# Altium PCB SEG_pressure gauge_up  V2.1.PcbDoc (part 3 of 5)
Units mm, origin at the board's own origin, x right, y up, seen from the top; angles counter-clockwise.
Board outline 67.74 x 67.74 mm, 2 copper layers (Top Layer, Bottom Layer); 36 components, 59 nets, 200 pads, 20 vias.
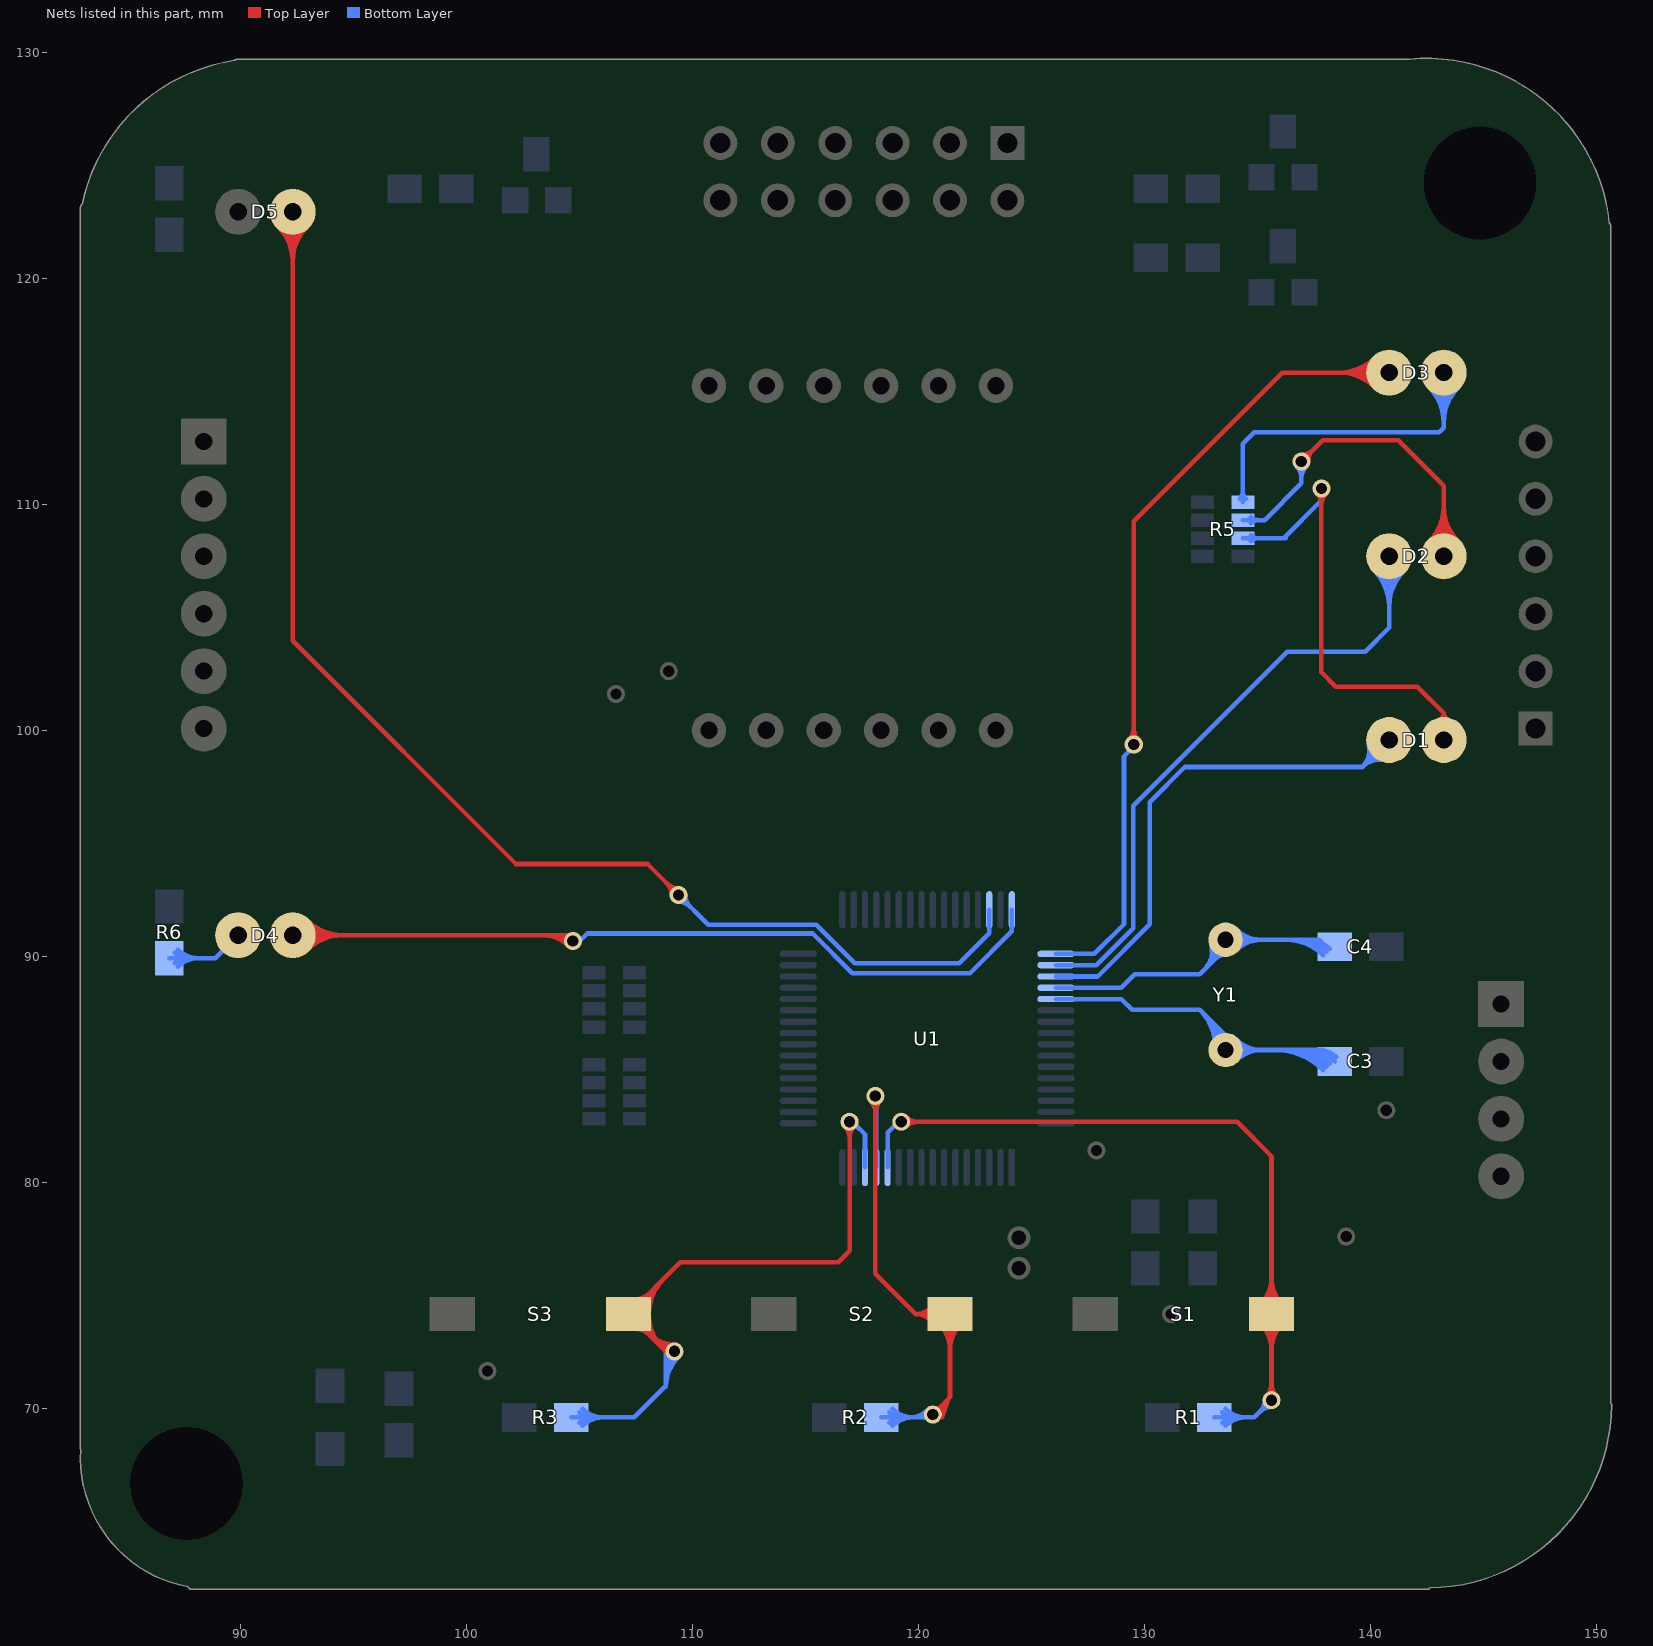
[diagram p3: the nets of this part, all layers, seen from the top]

## Via types
v1: diameter 0.8, hole 0.5, Top Layer to Bottom Layer, 20 vias

## Nets (pads, with @x,y where several pads share a name; then routed paths per layer and width w, separated by ;. In a path a pad name is that pad's centre, name@x,y a point inside that pad or via, vN(x,y) a via of type N, cw(c..) or ccw(c..) an arc to the next point about the centre after c; other vN are vias at no path point) (continued)
KEY1: pad.0@119.253,82.677 pad.1 R1.1 S1.1 U1.12 | length 107.5
  Top Layer w0.203: pad.0@119.253,82.677 134.112,82.677 135.636,81.153 S1.1@135.636,74.168 pad.1@135.636,70.358 ; pad.0@119.464,82.466 cw(c119.973,81.957) 119.973,82.677 ; pad.0@119.464,82.466 cw(c119.973,81.957) 119.973,82.677 ; pad.0@119.464,82.466 cw(c119.973,81.957) 119.973,82.677 ; pad.0@119.464,82.466 cw(c119.973,81.957) 119.973,82.677 ; pad.0@119.464,82.466 cw(c119.973,81.957) 119.973,82.677 ; pad.0@119.464,82.888 ccw(c119.973,83.397) 119.973,82.677 ; pad.0@119.464,82.888 ccw(c119.973,83.397) 119.973,82.677 ; pad.0@119.464,82.888 ccw(c119.973,83.397) 119.973,82.677 ; pad.0@119.464,82.888 ccw(c119.973,83.397) 119.973,82.677 ; pad.0@119.464,82.888 ccw(c119.973,83.397) 119.973,82.677 ; S1.1@135.178,73.71 cw(c134.071,72.603) 135.636,72.603 ; S1.1@135.178,73.71 cw(c134.071,72.603) 135.636,72.603 ; S1.1@135.178,73.71 cw(c134.071,72.603) 135.636,72.603 ; S1.1@135.178,73.71 cw(c134.071,72.603) 135.636,72.603 ; S1.1@135.178,73.71 cw(c134.071,72.603) 135.636,72.603 ; S1.1@135.178,74.626 ccw(c134.071,75.733) 135.636,75.733 ; S1.1@135.178,74.626 ccw(c134.071,75.733) 135.636,75.733 ; S1.1@135.178,74.626 ccw(c134.071,75.733) 135.636,75.733 ; S1.1@135.178,74.626 ccw(c134.071,75.733) 135.636,75.733 ; S1.1@135.178,74.626 ccw(c134.071,75.733) 135.636,75.733 ; S1.1@135.321,73.853 cw(c134.561,73.093) 135.636,73.093 ; S1.1@135.321,73.853 cw(c134.561,73.093) 135.636,73.093 ; S1.1@135.321,73.853 cw(c134.561,73.093) 135.636,73.093 ; S1.1@135.321,73.853 cw(c134.561,73.093) 135.636,73.093 ; S1.1@135.321,73.853 cw(c134.561,73.093) 135.636,73.093 ; S1.1@135.321,74.483 ccw(c134.561,75.243) 135.636,75.243 ; S1.1@135.321,74.483 ccw(c134.561,75.243) 135.636,75.243 ; S1.1@135.321,74.483 ccw(c134.561,75.243) 135.636,75.243 ; S1.1@135.321,74.483 ccw(c134.561,75.243) 135.636,75.243 ; S1.1@135.321,74.483 ccw(c134.561,75.243) 135.636,75.243 ; pad.1@135.425,70.569 ccw(c134.916,71.078) 135.636,71.078 ; pad.1@135.425,70.569 ccw(c134.916,71.078) 135.636,71.078 ; pad.1@135.425,70.569 ccw(c134.916,71.078) 135.636,71.078 ; pad.1@135.425,70.569 ccw(c134.916,71.078) 135.636,71.078 ; pad.1@135.425,70.569 ccw(c134.916,71.078) 135.636,71.078 ; 135.636,71.078 ccw(c136.356,71.078) pad.1@135.847,70.569 ; 135.636,71.078 ccw(c136.356,71.078) pad.1@135.847,70.569 ; 135.636,71.078 ccw(c136.356,71.078) pad.1@135.847,70.569 ; 135.636,71.078 ccw(c136.356,71.078) pad.1@135.847,70.569 ; 135.636,71.078 ccw(c136.356,71.078) pad.1@135.847,70.569 ; 135.636,72.603 cw(c137.201,72.603) S1.1@136.094,73.71 ; 135.636,72.603 cw(c137.201,72.603) S1.1@136.094,73.71 ; 135.636,72.603 cw(c137.201,72.603) S1.1@136.094,73.71 ; 135.636,72.603 cw(c137.201,72.603) S1.1@136.094,73.71 ; 135.636,72.603 cw(c137.201,72.603) S1.1@136.094,73.71 ; 135.636,73.093 cw(c136.711,73.093) S1.1@135.951,73.853 ; 135.636,73.093 cw(c136.711,73.093) S1.1@135.951,73.853 ; 135.636,73.093 cw(c136.711,73.093) S1.1@135.951,73.853 ; 135.636,73.093 cw(c136.711,73.093) S1.1@135.951,73.853 ; 135.636,73.093 cw(c136.711,73.093) S1.1@135.951,73.853 ; 135.636,75.243 ccw(c136.711,75.243) S1.1@135.951,74.483 ; 135.636,75.243 ccw(c136.711,75.243) S1.1@135.951,74.483 ; 135.636,75.243 ccw(c136.711,75.243) S1.1@135.951,74.483 ; 135.636,75.243 ccw(c136.711,75.243) S1.1@135.951,74.483 ; 135.636,75.243 ccw(c136.711,75.243) S1.1@135.951,74.483 ; 135.636,75.733 ccw(c137.201,75.733) S1.1@136.094,74.626 ; 135.636,75.733 ccw(c137.201,75.733) S1.1@136.094,74.626 ; 135.636,75.733 ccw(c137.201,75.733) S1.1@136.094,74.626 ; 135.636,75.733 ccw(c137.201,75.733) S1.1@136.094,74.626 ; 135.636,75.733 ccw(c137.201,75.733) S1.1@136.094,74.626
  Bottom Layer w0.203: U1.12@118.649,80.656 118.649,82.2 pad.0@118.999,82.55 ; R1.1@133.096,69.596 134.874,69.596 pad.1@135.636,70.358 ; R1.1@133.456,69.363 cw(c134.02,68.799) 134.02,69.596 ; R1.1@133.456,69.363 cw(c134.02,68.799) 134.02,69.596 ; R1.1@133.456,69.363 cw(c134.02,68.799) 134.02,69.596 ; R1.1@133.456,69.363 cw(c134.02,68.799) 134.02,69.596 ; R1.1@133.456,69.363 cw(c134.02,68.799) 134.02,69.596 ; R1.1@133.456,69.829 ccw(c134.02,70.393) 134.02,69.596 ; R1.1@133.456,69.829 ccw(c134.02,70.393) 134.02,69.596 ; R1.1@133.456,69.829 ccw(c134.02,70.393) 134.02,69.596 ; R1.1@133.456,69.829 ccw(c134.02,70.393) 134.02,69.596 ; R1.1@133.456,69.829 ccw(c134.02,70.393) 134.02,69.596 ; R1.1@133.6,69.219 cw(c134.511,68.308) 134.511,69.596 ; R1.1@133.6,69.219 cw(c134.511,68.308) 134.511,69.596 ; R1.1@133.6,69.219 cw(c134.511,68.308) 134.511,69.596 ; R1.1@133.6,69.219 cw(c134.511,68.308) 134.511,69.596 ; R1.1@133.6,69.219 cw(c134.511,68.308) 134.511,69.596 ; R1.1@133.6,69.973 ccw(c134.511,70.884) 134.511,69.596 ; R1.1@133.6,69.973 ccw(c134.511,70.884) 134.511,69.596 ; R1.1@133.6,69.973 ccw(c134.511,70.884) 134.511,69.596 ; R1.1@133.6,69.973 ccw(c134.511,70.884) 134.511,69.596 ; R1.1@133.6,69.973 ccw(c134.511,70.884) 134.511,69.596 ; 135.127,69.849 cw(c135.636,69.339) pad.1@135.636,70.06 ; 135.127,69.849 ccw(c134.617,70.358) pad.1@135.338,70.358 ; 135.127,69.849 cw(c135.636,69.339) pad.1@135.636,70.06 ; 135.127,69.849 ccw(c134.617,70.358) pad.1@135.338,70.358 ; 135.127,69.849 cw(c135.636,69.339) pad.1@135.636,70.06 ; 135.127,69.849 ccw(c134.617,70.358) pad.1@135.338,70.358 ; 135.127,69.849 cw(c135.636,69.339) pad.1@135.636,70.06 ; 135.127,69.849 ccw(c134.617,70.358) pad.1@135.338,70.358 ; 135.127,69.849 ccw(c134.617,70.358) pad.1@135.338,70.358 ; 135.127,69.849 cw(c135.636,69.339) pad.1@135.636,70.06
KEY2: pad.0@120.65,69.723 pad.3@118.11,83.82 R2.1 S2.1 U1.13 | length 95.2
  Top Layer w0.203: pad.3@118.11,83.82 118.11,75.946 119.888,74.168 ; 121.031,69.901 121.336,70.409 ; pad.3@117.899,83.609 cw(c117.39,83.1) 118.11,83.1 ; pad.3@117.899,83.609 cw(c117.39,83.1) 118.11,83.1 ; pad.3@117.899,83.609 cw(c117.39,83.1) 118.11,83.1 ; pad.3@117.899,83.609 cw(c117.39,83.1) 118.11,83.1 ; pad.3@117.899,83.609 cw(c117.39,83.1) 118.11,83.1 ; 118.11,83.1 cw(c118.83,83.1) pad.3@118.321,83.609 ; 118.11,83.1 cw(c118.83,83.1) pad.3@118.321,83.609 ; 118.11,83.1 cw(c118.83,83.1) pad.3@118.321,83.609 ; 118.11,83.1 cw(c118.83,83.1) pad.3@118.321,83.609 ; 118.11,83.1 cw(c118.83,83.1) pad.3@118.321,83.609 ; 119.888,74.168 cw(c119.888,73.241) S2.1@120.638,73.786 ; 119.888,74.168 ccw(c119.888,75.095) S2.1@120.638,74.55 ; 119.888,74.168 cw(c119.888,73.241) S2.1@120.638,73.786 ; 119.888,74.168 ccw(c119.888,75.095) S2.1@120.638,74.55 ; 119.888,74.168 cw(c119.888,73.241) S2.1@120.638,73.786 ; 119.888,74.168 ccw(c119.888,75.095) S2.1@120.638,74.55 ; 119.888,74.168 cw(c119.888,73.241) S2.1@120.638,73.786 ; 119.888,74.168 ccw(c119.888,75.095) S2.1@120.638,74.55 ; 119.888,74.168 ccw(c119.888,75.095) S2.1@120.638,74.55 ; 119.888,74.168 cw(c119.888,73.241) S2.1@120.638,73.786 ; 119.888,74.168 S2.1@121.412,74.168 121.412,70.485 121.336,70.409 ; 120.287,74.168 cw(c120.287,73.531) S2.1@120.802,73.906 ; 120.287,74.168 ccw(c120.287,74.805) S2.1@120.802,74.43 ; 120.287,74.168 cw(c120.287,73.531) S2.1@120.802,73.906 ; 120.287,74.168 ccw(c120.287,74.805) S2.1@120.802,74.43 ; 120.287,74.168 cw(c120.287,73.531) S2.1@120.802,73.906 ; 120.287,74.168 ccw(c120.287,74.805) S2.1@120.802,74.43 ; 120.287,74.168 cw(c120.287,73.531) S2.1@120.802,73.906 ; 120.287,74.168 ccw(c120.287,74.805) S2.1@120.802,74.43 ; 120.287,74.168 ccw(c120.287,74.805) S2.1@120.802,74.43 ; 120.287,74.168 cw(c120.287,73.531) S2.1@120.802,73.906 ; S2.1@120.954,73.71 cw(c119.847,72.603) 121.412,72.603 ; S2.1@120.954,73.71 cw(c119.847,72.603) 121.412,72.603 ; S2.1@120.954,73.71 cw(c119.847,72.603) 121.412,72.603 ; S2.1@120.954,73.71 cw(c119.847,72.603) 121.412,72.603 ; S2.1@120.954,73.71 cw(c119.847,72.603) 121.412,72.603 ; S2.1@121.097,73.853 cw(c120.337,73.093) 121.412,73.093 ; S2.1@121.097,73.853 cw(c120.337,73.093) 121.412,73.093 ; S2.1@121.097,73.853 cw(c120.337,73.093) 121.412,73.093 ; S2.1@121.097,73.853 cw(c120.337,73.093) 121.412,73.093 ; S2.1@121.097,73.853 cw(c120.337,73.093) 121.412,73.093 ; 121.336,70.409 121.056,69.596 pad.0@120.65,69.723 121.336,70.409 ; 121.412,72.603 cw(c122.977,72.603) S2.1@121.87,73.71 ; 121.412,72.603 cw(c122.977,72.603) S2.1@121.87,73.71 ; 121.412,72.603 cw(c122.977,72.603) S2.1@121.87,73.71 ; 121.412,72.603 cw(c122.977,72.603) S2.1@121.87,73.71 ; 121.412,72.603 cw(c122.977,72.603) S2.1@121.87,73.71 ; 121.412,73.093 cw(c122.487,73.093) S2.1@121.727,73.853 ; 121.412,73.093 cw(c122.487,73.093) S2.1@121.727,73.853 ; 121.412,73.093 cw(c122.487,73.093) S2.1@121.727,73.853 ; 121.412,73.093 cw(c122.487,73.093) S2.1@121.727,73.853 ; 121.412,73.093 cw(c122.487,73.093) S2.1@121.727,73.853
  Bottom Layer w0.203: U1.13@118.149,80.656 pad.3@118.149,83.566 ; R2.1@118.364,69.596 120.523,69.596 pad.0@120.65,69.723 ; pad.3@117.899,83.609 cw(c117.295,83.005) 118.149,83.005 ; pad.3@117.899,83.609 cw(c117.295,83.005) 118.149,83.005 ; pad.3@117.899,83.609 cw(c117.295,83.005) 118.149,83.005 ; pad.3@117.899,83.609 cw(c117.295,83.005) 118.149,83.005 ; pad.3@117.899,83.609 cw(c117.295,83.005) 118.149,83.005 ; 118.149,83.194 cw(c118.736,83.194) pad.3@118.321,83.609 ; 118.149,83.194 cw(c118.736,83.194) pad.3@118.321,83.609 ; 118.149,83.194 cw(c118.736,83.194) pad.3@118.321,83.609 ; 118.149,83.194 cw(c118.736,83.194) pad.3@118.321,83.609 ; 118.149,83.194 cw(c118.736,83.194) pad.3@118.321,83.609 ; R2.1@118.724,69.363 cw(c119.288,68.799) 119.288,69.596 ; R2.1@118.724,69.363 cw(c119.288,68.799) 119.288,69.596 ; R2.1@118.724,69.363 cw(c119.288,68.799) 119.288,69.596 ; R2.1@118.724,69.363 cw(c119.288,68.799) 119.288,69.596 ; R2.1@118.724,69.363 cw(c119.288,68.799) 119.288,69.596 ; R2.1@118.724,69.829 ccw(c119.288,70.393) 119.288,69.596 ; R2.1@118.724,69.829 ccw(c119.288,70.393) 119.288,69.596 ; R2.1@118.724,69.829 ccw(c119.288,70.393) 119.288,69.596 ; R2.1@118.724,69.829 ccw(c119.288,70.393) 119.288,69.596 ; R2.1@118.724,69.829 ccw(c119.288,70.393) 119.288,69.596 ; R2.1@118.868,69.219 cw(c119.779,68.308) 119.779,69.596 ; R2.1@118.868,69.219 cw(c119.779,68.308) 119.779,69.596 ; R2.1@118.868,69.219 cw(c119.779,68.308) 119.779,69.596 ; R2.1@118.868,69.219 cw(c119.779,68.308) 119.779,69.596 ; R2.1@118.868,69.219 cw(c119.779,68.308) 119.779,69.596 ; R2.1@118.868,69.973 ccw(c119.779,70.884) 119.779,69.596 ; R2.1@118.868,69.973 ccw(c119.779,70.884) 119.779,69.596 ; R2.1@118.868,69.973 ccw(c119.779,70.884) 119.779,69.596 ; R2.1@118.868,69.973 ccw(c119.779,70.884) 119.779,69.596 ; R2.1@118.868,69.973 ccw(c119.779,70.884) 119.779,69.596 ; 119.623,69.596 ccw(c119.623,70.75) pad.0@120.439,69.934 ; 119.623,69.596 ccw(c119.623,70.75) pad.0@120.439,69.934 ; 119.623,69.596 ccw(c119.623,70.75) pad.0@120.439,69.934 ; 119.623,69.596 ccw(c119.623,70.75) pad.0@120.439,69.934 ; 119.623,69.596 ccw(c119.623,70.75) pad.0@120.439,69.934 ; 120.114,69.596 ccw(c120.114,70.259) pad.0@120.583,69.79 ; 120.114,69.596 ccw(c120.114,70.259) pad.0@120.583,69.79 ; 120.114,69.596 ccw(c120.114,70.259) pad.0@120.583,69.79 ; 120.114,69.596 ccw(c120.114,70.259) pad.0@120.583,69.79 ; 120.114,69.596 ccw(c120.114,70.259) pad.0@120.583,69.79 ; 120.236,69.596 cw(c120.236,69.309) pad.0@120.439,69.512 ; 120.236,69.596 cw(c120.236,69.309) pad.0@120.439,69.512 ; 120.236,69.596 cw(c120.236,69.309) pad.0@120.439,69.512 ; 120.236,69.596 cw(c120.236,69.309) pad.0@120.439,69.512 ; 120.236,69.596 cw(c120.236,69.309) pad.0@120.439,69.512
KEY3: pad.2@116.967,82.677 pad.19 R3.1 S3.1 U1.14 | length 129.7
  Top Layer w0.203: pad.19@109.22,72.517 108.839,72.517 S3.1@107.188,74.168 109.474,76.454 116.459,76.454 116.967,76.962 pad.2@116.967,82.677 ; S3.1@107.438,73.52 cw(c107.438,72.558) 108.118,73.238 ; S3.1@107.438,73.52 cw(c107.438,72.558) 108.118,73.238 ; S3.1@107.438,73.52 cw(c107.438,72.558) 108.118,73.238 ; S3.1@107.438,73.52 cw(c107.438,72.558) 108.118,73.238 ; S3.1@107.438,73.52 cw(c107.438,72.558) 108.118,73.238 ; S3.1@107.438,74.816 ccw(c107.438,75.778) 108.118,75.098 ; S3.1@107.438,74.816 ccw(c107.438,75.778) 108.118,75.098 ; S3.1@107.438,74.816 ccw(c107.438,75.778) 108.118,75.098 ; S3.1@107.438,74.816 ccw(c107.438,75.778) 108.118,75.098 ; S3.1@107.438,74.816 ccw(c107.438,75.778) 108.118,75.098 ; S3.1@107.68,74.167 ccw(c108.854,74.162) 108.024,73.332 ; S3.1@107.68,74.167 ccw(c108.854,74.162) 108.024,73.332 ; S3.1@107.68,74.167 ccw(c108.854,74.162) 108.024,73.332 ; S3.1@107.68,74.167 ccw(c108.854,74.162) 108.024,73.332 ; S3.1@107.68,74.167 ccw(c108.854,74.162) 108.024,73.332 ; S3.1@107.68,74.168 cw(c108.868,74.168) 108.028,75.008 ; S3.1@107.68,74.168 cw(c108.868,74.168) 108.028,75.008 ; S3.1@107.68,74.168 cw(c108.868,74.168) 108.028,75.008 ; S3.1@107.68,74.168 cw(c108.868,74.168) 108.028,75.008 ; S3.1@107.68,74.168 cw(c108.868,74.168) 108.028,75.008 ; S3.1@107.883,74.166 ccw(c109.542,74.16) 108.369,72.987 ; S3.1@107.883,74.166 ccw(c109.542,74.16) 108.369,72.987 ; S3.1@107.883,74.166 ccw(c109.542,74.16) 108.369,72.987 ; S3.1@107.883,74.166 ccw(c109.542,74.16) 108.369,72.987 ; S3.1@107.883,74.166 ccw(c109.542,74.16) 108.369,72.987 ; S3.1@107.883,74.168 cw(c109.562,74.168) 108.375,75.355 ; S3.1@107.883,74.168 cw(c109.562,74.168) 108.375,75.355 ; S3.1@107.883,74.168 cw(c109.562,74.168) 108.375,75.355 ; S3.1@107.883,74.168 cw(c109.562,74.168) 108.375,75.355 ; S3.1@107.883,74.168 cw(c109.562,74.168) 108.375,75.355 ; 108.06,73.296 ccw(c109.22,74.456) pad.19@109.22,72.815 ; 108.06,73.296 ccw(c109.22,74.456) pad.19@109.22,72.815 ; 108.06,73.296 ccw(c109.22,74.456) pad.19@109.22,72.815 ; 108.06,73.296 ccw(c109.22,74.456) pad.19@109.22,72.815 ; 108.06,73.296 ccw(c109.22,74.456) pad.19@109.22,72.815 ; S3.1@108.086,74.165 ccw(c110.229,74.157) 108.714,72.642 ; S3.1@108.086,74.165 ccw(c110.229,74.157) 108.714,72.642 ; S3.1@108.086,74.165 ccw(c110.229,74.157) 108.714,72.642 ; S3.1@108.086,74.165 ccw(c110.229,74.157) 108.714,72.642 ; S3.1@108.086,74.165 ccw(c110.229,74.157) 108.714,72.642 ; S3.1@108.086,74.168 cw(c110.255,74.168) 108.722,75.702 ; S3.1@108.086,74.168 cw(c110.255,74.168) 108.722,75.702 ; S3.1@108.086,74.168 cw(c110.255,74.168) 108.722,75.702 ; S3.1@108.086,74.168 cw(c110.255,74.168) 108.722,75.702 ; S3.1@108.086,74.168 cw(c110.255,74.168) 108.722,75.702 ; 108.407,72.949 ccw(c109.22,73.762) pad.19@109.22,72.612 ; 108.407,72.949 ccw(c109.22,73.762) pad.19@109.22,72.612 ; 108.407,72.949 ccw(c109.22,73.762) pad.19@109.22,72.612 ; 108.407,72.949 ccw(c109.22,73.762) pad.19@109.22,72.612 ; 108.407,72.949 ccw(c109.22,73.762) pad.19@109.22,72.612 ; 108.754,72.602 ccw(c109.22,73.068) pad.19@109.22,72.409 ; 108.754,72.602 ccw(c109.22,73.068) pad.19@109.22,72.409 ; 108.754,72.602 ccw(c109.22,73.068) pad.19@109.22,72.409 ; 108.754,72.602 ccw(c109.22,73.068) pad.19@109.22,72.409 ; 108.754,72.602 ccw(c109.22,73.068) pad.19@109.22,72.409 ; pad.2@116.756,82.466 cw(c116.247,81.957) 116.967,81.957 ; pad.2@116.756,82.466 cw(c116.247,81.957) 116.967,81.957 ; pad.2@116.756,82.466 cw(c116.247,81.957) 116.967,81.957 ; pad.2@116.756,82.466 cw(c116.247,81.957) 116.967,81.957 ; pad.2@116.756,82.466 cw(c116.247,81.957) 116.967,81.957 ; 116.967,81.957 cw(c117.687,81.957) pad.2@117.178,82.466 ; 116.967,81.957 cw(c117.687,81.957) pad.2@117.178,82.466 ; 116.967,81.957 cw(c117.687,81.957) pad.2@117.178,82.466 ; 116.967,81.957 cw(c117.687,81.957) pad.2@117.178,82.466 ; 116.967,81.957 cw(c117.687,81.957) pad.2@117.178,82.466
  Bottom Layer w0.203: R3.1@104.648,69.596 107.442,69.596 108.839,70.993 108.839,72.263 pad.19@108.966,72.39 ; pad.2@117.221,82.55 117.649,82.122 U1.14@117.649,80.656 ; R3.1@105.008,69.363 cw(c105.572,68.799) 105.572,69.596 ; R3.1@105.008,69.363 cw(c105.572,68.799) 105.572,69.596 ; R3.1@105.008,69.363 cw(c105.572,68.799) 105.572,69.596 ; R3.1@105.008,69.363 cw(c105.572,68.799) 105.572,69.596 ; R3.1@105.008,69.363 cw(c105.572,68.799) 105.572,69.596 ; R3.1@105.008,69.829 ccw(c105.572,70.393) 105.572,69.596 ; R3.1@105.008,69.829 ccw(c105.572,70.393) 105.572,69.596 ; R3.1@105.008,69.829 ccw(c105.572,70.393) 105.572,69.596 ; R3.1@105.008,69.829 ccw(c105.572,70.393) 105.572,69.596 ; R3.1@105.008,69.829 ccw(c105.572,70.393) 105.572,69.596 ; R3.1@105.152,69.219 cw(c106.063,68.308) 106.063,69.596 ; R3.1@105.152,69.219 cw(c106.063,68.308) 106.063,69.596 ; R3.1@105.152,69.219 cw(c106.063,68.308) 106.063,69.596 ; R3.1@105.152,69.219 cw(c106.063,68.308) 106.063,69.596 ; R3.1@105.152,69.219 cw(c106.063,68.308) 106.063,69.596 ; R3.1@105.152,69.973 ccw(c106.063,70.884) 106.063,69.596 ; R3.1@105.152,69.973 ccw(c106.063,70.884) 106.063,69.596 ; R3.1@105.152,69.973 ccw(c106.063,70.884) 106.063,69.596 ; R3.1@105.152,69.973 ccw(c106.063,70.884) 106.063,69.596 ; R3.1@105.152,69.973 ccw(c106.063,70.884) 106.063,69.596 ; 108.839,70.946 cw(c110.696,70.946) pad.19@109.424,72.3 ; 108.839,70.946 cw(c110.696,70.946) pad.19@109.424,72.3 ; 108.839,70.946 cw(c110.696,70.946) pad.19@109.424,72.3 ; 108.839,70.946 cw(c110.696,70.946) pad.19@109.424,72.3 ; 108.839,70.946 cw(c110.696,70.946) pad.19@109.424,72.3 ; 108.839,71.416 cw(c110.255,71.416) pad.19@109.285,72.448 ; 108.839,71.416 cw(c110.255,71.416) pad.19@109.285,72.448 ; 108.839,71.416 cw(c110.255,71.416) pad.19@109.285,72.448 ; 108.839,71.416 cw(c110.255,71.416) pad.19@109.285,72.448 ; 108.839,71.416 cw(c110.255,71.416) pad.19@109.285,72.448 ; 108.839,71.886 cw(c109.813,71.886) pad.19@109.146,72.596 ; 108.839,71.886 cw(c109.813,71.886) pad.19@109.146,72.596 ; 108.839,71.886 cw(c109.813,71.886) pad.19@109.146,72.596 ; 108.839,71.886 cw(c109.813,71.886) pad.19@109.146,72.596 ; 108.839,71.886 cw(c109.813,71.886) pad.19@109.146,72.596 ; 108.839,72.356 cw(c109.372,72.356) pad.19@109.007,72.744 ; 108.839,72.356 cw(c109.372,72.356) pad.19@109.007,72.744 ; 108.839,72.356 cw(c109.372,72.356) pad.19@109.007,72.744 ; 108.839,72.356 cw(c109.372,72.356) pad.19@109.007,72.744 ; 108.839,72.356 cw(c109.372,72.356) pad.19@109.007,72.744
LED2: D5.2 U1.46 | length 76.9
  Top Layer w0.203: D5.2@91.687,122.285 cw(c90.177,120.752) 92.329,120.752 ; D5.2@91.83,122.429 cw(c90.655,121.237) 92.329,121.237 cw(c94.003,121.237) D5.2@92.828,122.429 ; D5.2@91.973,122.574 cw(c91.134,121.723) 92.329,121.723 cw(c93.524,121.723) D5.2@92.685,122.574 ; 92.329,112.827 92.329,112.649 ; 92.329,120.904 92.329,120.752 ; D5.2@92.329,122.936 92.329,120.752 ; D5.2@92.971,122.285 ccw(c94.481,120.752) 92.329,120.752 ; v1(109.398,92.71) 108.026,94.082 102.21,94.082 92.329,103.962 92.329,112.649 ; 92.329,112.649 92.329,120.752 ; 108.888,93.219 cw(c108.379,92.71) v1@109.099,92.71 ; 108.888,93.219 ccw(c109.398,93.729) v1@109.398,93.008 ; 108.888,93.219 cw(c108.379,92.71) v1@109.099,92.71 ; 108.888,93.219 ccw(c109.398,93.729) v1@109.398,93.008 ; 108.888,93.219 cw(c108.379,92.71) v1@109.099,92.71 ; 108.888,93.219 ccw(c109.398,93.729) v1@109.398,93.008 ; 108.888,93.219 cw(c108.379,92.71) v1@109.099,92.71 ; 108.888,93.219 ccw(c109.398,93.729) v1@109.398,93.008 ; 108.888,93.219 ccw(c109.398,93.729) v1@109.398,93.008 ; 108.888,93.219 cw(c108.379,92.71) v1@109.099,92.71
  Bottom Layer w0.203: v1(109.398,92.71) 110.719,91.389 115.499,91.389 117.201,89.687 121.818,89.687 123.149,91.018 U1.46@123.149,92.056 ; v1@109.398,92.412 cw(c109.398,91.691) 109.907,92.201 ; v1@109.398,92.412 cw(c109.398,91.691) 109.907,92.201 ; v1@109.398,92.412 cw(c109.398,91.691) 109.907,92.201 ; v1@109.398,92.412 cw(c109.398,91.691) 109.907,92.201 ; v1@109.398,92.412 cw(c109.398,91.691) 109.907,92.201 ; v1@109.696,92.71 ccw(c110.417,92.71) 109.907,92.201 ; v1@109.696,92.71 ccw(c110.417,92.71) 109.907,92.201 ; v1@109.696,92.71 ccw(c110.417,92.71) 109.907,92.201 ; v1@109.696,92.71 ccw(c110.417,92.71) 109.907,92.201 ; v1@109.696,92.71 ccw(c110.417,92.71) 109.907,92.201
LED4: D4.2 U1.48 | length 87.8
  Top Layer w0.203: D4.2@92.329,90.932 104.521,90.932 104.496,90.907 v1@104.47,90.881 ; D4.2@92.688,90.573 cw(c93.555,89.706) 93.555,90.932 ; D4.2@92.688,90.573 cw(c93.555,89.706) 93.555,90.932 ; D4.2@92.688,90.573 cw(c93.555,89.706) 93.555,90.932 ; D4.2@92.688,90.573 cw(c93.555,89.706) 93.555,90.932 ; D4.2@92.688,90.573 cw(c93.555,89.706) 93.555,90.932 ; D4.2@92.688,91.291 ccw(c93.555,92.158) 93.555,90.932 ; D4.2@92.688,91.291 ccw(c93.555,92.158) 93.555,90.932 ; D4.2@92.688,91.291 ccw(c93.555,92.158) 93.555,90.932 ; D4.2@92.688,91.291 ccw(c93.555,92.158) 93.555,90.932 ; D4.2@92.688,91.291 ccw(c93.555,92.158) 93.555,90.932 ; D4.2@92.832,90.429 cw(c94.046,89.215) 94.046,90.932 ; D4.2@92.832,90.429 cw(c94.046,89.215) 94.046,90.932 ; D4.2@92.832,90.429 cw(c94.046,89.215) 94.046,90.932 ; D4.2@92.832,90.429 cw(c94.046,89.215) 94.046,90.932 ; D4.2@92.832,90.429 cw(c94.046,89.215) 94.046,90.932 ; D4.2@92.832,91.435 ccw(c94.046,92.649) 94.046,90.932 ; D4.2@92.832,91.435 ccw(c94.046,92.649) 94.046,90.932 ; D4.2@92.832,91.435 ccw(c94.046,92.649) 94.046,90.932 ; D4.2@92.832,91.435 ccw(c94.046,92.649) 94.046,90.932 ; D4.2@92.832,91.435 ccw(c94.046,92.649) 94.046,90.932 ; D4.2@92.976,90.285 cw(c94.537,88.724) 94.537,90.932 ; D4.2@92.976,90.285 cw(c94.537,88.724) 94.537,90.932 ; D4.2@92.976,90.285 cw(c94.537,88.724) 94.537,90.932 ; D4.2@92.976,90.285 cw(c94.537,88.724) 94.537,90.932 ; D4.2@92.976,90.285 cw(c94.537,88.724) 94.537,90.932 ; D4.2@92.976,91.579 ccw(c94.537,93.14) 94.537,90.932 ; D4.2@92.976,91.579 ccw(c94.537,93.14) 94.537,90.932 ; D4.2@92.976,91.579 ccw(c94.537,93.14) 94.537,90.932 ; D4.2@92.976,91.579 ccw(c94.537,93.14) 94.537,90.932 ; D4.2@92.976,91.579 ccw(c94.537,93.14) 94.537,90.932 ; 103.391,90.932 cw(c103.391,89.344) v1@104.513,90.467 ; 103.391,90.932 cw(c103.391,89.344) v1@104.513,90.467 ; 103.391,90.932 cw(c103.391,89.344) v1@104.513,90.467 ; 103.391,90.932 cw(c103.391,89.344) v1@104.513,90.467 ; 103.391,90.932 cw(c103.391,89.344) v1@104.513,90.467 ; 103.881,90.932 cw(c103.881,89.835) v1@104.657,90.611 ; 103.881,90.932 cw(c103.881,89.835) v1@104.657,90.611 ; 103.881,90.932 cw(c103.881,89.835) v1@104.657,90.611 ; 103.881,90.932 cw(c103.881,89.835) v1@104.657,90.611 ; 103.881,90.932 cw(c103.881,89.835) v1@104.657,90.611 ; 104.372,90.932 cw(c104.372,90.326) v1@104.801,90.754 ; 104.372,90.932 cw(c104.372,90.326) v1@104.801,90.754 ; 104.372,90.932 cw(c104.372,90.326) v1@104.801,90.754 ; 104.372,90.932 cw(c104.372,90.326) v1@104.801,90.754 ; 104.372,90.932 cw(c104.372,90.326) v1@104.801,90.754
  Bottom Layer w0.203: v1(104.724,90.678) 104.878,90.525 105.361,91.008 115.341,91.008 117.094,89.256 122.295,89.256 124.149,91.11 U1.48@124.149,92.056
LED5: D3.2 U1.49 | length 82.5
  Top Layer w0.203: v1(129.54,99.365) 129.54,109.245 136.119,115.824 D3.2@140.843,115.824 ; v1@129.329,99.576 ccw(c128.82,100.085) 129.54,100.085 ; v1@129.329,99.576 ccw(c128.82,100.085) 129.54,100.085 ; v1@129.329,99.576 ccw(c128.82,100.085) 129.54,100.085 ; v1@129.329,99.576 ccw(c128.82,100.085) 129.54,100.085 ; v1@129.329,99.576 ccw(c128.82,100.085) 129.54,100.085 ; 129.54,100.085 ccw(c130.26,100.085) v1@129.751,99.576 ; 129.54,100.085 ccw(c130.26,100.085) v1@129.751,99.576 ; 129.54,100.085 ccw(c130.26,100.085) v1@129.751,99.576 ; 129.54,100.085 ccw(c130.26,100.085) v1@129.751,99.576 ; 129.54,100.085 ccw(c130.26,100.085) v1@129.751,99.576 ; 138.635,115.824 cw(c138.635,113.616) D3.2@140.196,115.177 ; 138.635,115.824 ccw(c138.635,118.032) D3.2@140.196,116.471 ; 138.635,115.824 cw(c138.635,113.616) D3.2@140.196,115.177 ; 138.635,115.824 ccw(c138.635,118.032) D3.2@140.196,116.471 ; 138.635,115.824 cw(c138.635,113.616) D3.2@140.196,115.177 ; 138.635,115.824 ccw(c138.635,118.032) D3.2@140.196,116.471 ; 138.635,115.824 cw(c138.635,113.616) D3.2@140.196,115.177 ; 138.635,115.824 ccw(c138.635,118.032) D3.2@140.196,116.471 ; 138.635,115.824 ccw(c138.635,118.032) D3.2@140.196,116.471 ; 138.635,115.824 cw(c138.635,113.616) D3.2@140.196,115.177 ; 139.126,115.824 cw(c139.126,114.107) D3.2@140.34,115.321 ; 139.126,115.824 ccw(c139.126,117.541) D3.2@140.34,116.327 ; 139.126,115.824 cw(c139.126,114.107) D3.2@140.34,115.321 ; 139.126,115.824 ccw(c139.126,117.541) D3.2@140.34,116.327 ; 139.126,115.824 cw(c139.126,114.107) D3.2@140.34,115.321 ; 139.126,115.824 ccw(c139.126,117.541) D3.2@140.34,116.327 ; 139.126,115.824 cw(c139.126,114.107) D3.2@140.34,115.321 ; 139.126,115.824 ccw(c139.126,117.541) D3.2@140.34,116.327 ; 139.126,115.824 ccw(c139.126,117.541) D3.2@140.34,116.327 ; 139.126,115.824 cw(c139.126,114.107) D3.2@140.34,115.321 ; 139.617,115.824 cw(c139.617,114.598) D3.2@140.484,115.465 ; 139.617,115.824 ccw(c139.617,117.05) D3.2@140.484,116.183 ; 139.617,115.824 cw(c139.617,114.598) D3.2@140.484,115.465 ; 139.617,115.824 ccw(c139.617,117.05) D3.2@140.484,116.183 ; 139.617,115.824 cw(c139.617,114.598) D3.2@140.484,115.465 ; 139.617,115.824 ccw(c139.617,117.05) D3.2@140.484,116.183 ; 139.617,115.824 cw(c139.617,114.598) D3.2@140.484,115.465 ; 139.617,115.824 ccw(c139.617,117.05) D3.2@140.484,116.183 ; 139.617,115.824 ccw(c139.617,117.05) D3.2@140.484,116.183 ; 139.617,115.824 cw(c139.617,114.598) D3.2@140.484,115.465
  Bottom Layer w0.203: U1.49@126.099,90.106 127.799,90.106 129.108,91.415 129.108,98.857 129.499,99.247 v1@129.499,99.273 ; D3.2@140.843,114.935 D3.2@140.843,115.824
LED6: D2.2 U1.50 | length 67.7
  Bottom Layer w0.203: U1.50@126.099,89.606 127.874,89.606 129.515,91.246 129.515,96.658 136.337,103.48 139.776,103.48 140.843,104.546 D2.2@140.843,107.696 ; D2.2@140.196,107.049 cw(c138.635,105.488) 140.843,105.488 ; D2.2@140.196,107.049 cw(c138.635,105.488) 140.843,105.488 ; D2.2@140.196,107.049 cw(c138.635,105.488) 140.843,105.488 ; D2.2@140.196,107.049 cw(c138.635,105.488) 140.843,105.488 ; D2.2@140.196,107.049 cw(c138.635,105.488) 140.843,105.488 ; D2.2@140.34,107.193 cw(c139.126,105.979) 140.843,105.979 ; D2.2@140.34,107.193 cw(c139.126,105.979) 140.843,105.979 ; D2.2@140.34,107.193 cw(c139.126,105.979) 140.843,105.979 ; D2.2@140.34,107.193 cw(c139.126,105.979) 140.843,105.979 ; D2.2@140.34,107.193 cw(c139.126,105.979) 140.843,105.979 ; D2.2@140.484,107.337 cw(c139.617,106.47) 140.843,106.47 ; D2.2@140.484,107.337 cw(c139.617,106.47) 140.843,106.47 ; D2.2@140.484,107.337 cw(c139.617,106.47) 140.843,106.47 ; D2.2@140.484,107.337 cw(c139.617,106.47) 140.843,106.47 ; D2.2@140.484,107.337 cw(c139.617,106.47) 140.843,106.47 ; 140.843,105.488 cw(c143.051,105.488) D2.2@141.49,107.049 ; 140.843,105.488 cw(c143.051,105.488) D2.2@141.49,107.049 ; 140.843,105.488 cw(c143.051,105.488) D2.2@141.49,107.049 ; 140.843,105.488 cw(c143.051,105.488) D2.2@141.49,107.049 ; 140.843,105.488 cw(c143.051,105.488) D2.2@141.49,107.049 ; 140.843,105.979 cw(c142.56,105.979) D2.2@141.346,107.193 ; 140.843,105.979 cw(c142.56,105.979) D2.2@141.346,107.193 ; 140.843,105.979 cw(c142.56,105.979) D2.2@141.346,107.193 ; 140.843,105.979 cw(c142.56,105.979) D2.2@141.346,107.193 ; 140.843,105.979 cw(c142.56,105.979) D2.2@141.346,107.193 ; 140.843,106.47 cw(c142.069,106.47) D2.2@141.202,107.337 ; 140.843,106.47 cw(c142.069,106.47) D2.2@141.202,107.337 ; 140.843,106.47 cw(c142.069,106.47) D2.2@141.202,107.337 ; 140.843,106.47 cw(c142.069,106.47) D2.2@141.202,107.337 ; 140.843,106.47 cw(c142.069,106.47) D2.2@141.202,107.337
LED7: D1.2 U1.51 | length 41.6
  Bottom Layer w0.203: U1.51@126.099,89.106 127.949,89.106 130.251,91.408 130.251,96.819 131.806,98.374 133.299,98.374 ; 133.35,98.374 139.649,98.374 ; D1.2@140.843,99.568 139.649,98.374 ; 139.649,98.374 cw(c140.428,97.596) D1.2@140.655,98.673 ; 139.649,98.374 ccw(c138.871,99.153) D1.2@139.948,99.38 ; 139.649,98.374 cw(c140.428,97.596) D1.2@140.655,98.673 ; 139.649,98.374 ccw(c138.871,99.153) D1.2@139.948,99.38 ; 139.649,98.374 cw(c140.428,97.596) D1.2@140.655,98.673 ; 139.649,98.374 ccw(c138.871,99.153) D1.2@139.948,99.38 ; 139.649,98.374 cw(c140.428,97.596) D1.2@140.655,98.673 ; 139.649,98.374 ccw(c138.871,99.153) D1.2@139.948,99.38 ; 139.649,98.374 ccw(c138.871,99.153) D1.2@139.948,99.38 ; 139.649,98.374 cw(c140.428,97.596) D1.2@140.655,98.673 ; 139.915,98.64 cw(c140.52,98.034) D1.2@140.697,98.872 ; 139.915,98.64 ccw(c139.309,99.245) D1.2@140.147,99.422 ; 139.915,98.64 cw(c140.52,98.034) D1.2@140.697,98.872 ; 139.915,98.64 ccw(c139.309,99.245) D1.2@140.147,99.422 ; 139.915,98.64 cw(c140.52,98.034) D1.2@140.697,98.872 ; 139.915,98.64 ccw(c139.309,99.245) D1.2@140.147,99.422 ; 139.915,98.64 cw(c140.52,98.034) D1.2@140.697,98.872 ; 139.915,98.64 ccw(c139.309,99.245) D1.2@140.147,99.422 ; 139.915,98.64 ccw(c139.309,99.245) D1.2@140.147,99.422 ; 139.915,98.64 cw(c140.52,98.034) D1.2@140.697,98.872
NetC3_2: C3.2 U1.53 Y1.1 | length 102.6
  Bottom Layer w0.203: U1.53@126.099,88.106 129,88.106 129.475,87.63 132.461,87.63 Y1.1@133.604,86.487 ; Y1.1@133.604,85.852 137.922,85.852 C3.2@138.43,85.344 ; 132.469,87.622 cw(c130.826,85.979) Y1.1@133.147,85.873 ; 132.469,87.622 cw(c130.826,85.979) Y1.1@133.147,85.873 ; 132.469,87.622 cw(c130.826,85.979) Y1.1@133.147,85.873 ; 132.469,87.622 cw(c130.826,85.979) Y1.1@133.147,85.873 ; 132.469,87.622 cw(c130.826,85.979) Y1.1@133.147,85.873 ; 132.795,87.296 cw(c131.449,85.95) Y1.1@133.35,85.864 ; 132.795,87.296 cw(c131.449,85.95) Y1.1@133.35,85.864 ; 132.795,87.296 cw(c131.449,85.95) Y1.1@133.35,85.864 ; 132.795,87.296 cw(c131.449,85.95) Y1.1@133.35,85.864 ; 132.795,87.296 cw(c131.449,85.95) Y1.1@133.35,85.864 ; 133.121,86.97 cw(c132.072,85.922) Y1.1@133.553,85.854 ; 133.121,86.97 cw(c132.072,85.922) Y1.1@133.553,85.854 ; 133.121,86.97 cw(c132.072,85.922) Y1.1@133.553,85.854 ; 133.121,86.97 cw(c132.072,85.922) Y1.1@133.553,85.854 ; 133.121,86.97 cw(c132.072,85.922) Y1.1@133.553,85.854 ; 133.446,86.645 cw(c132.695,85.894) Y1.1@133.756,85.845 ; 133.446,86.645 cw(c132.695,85.894) Y1.1@133.756,85.845 ; 133.446,86.645 cw(c132.695,85.894) Y1.1@133.756,85.845 ; 133.446,86.645 cw(c132.695,85.894) Y1.1@133.756,85.845 ; 133.446,86.645 cw(c132.695,85.894) Y1.1@133.756,85.845 ; Y1.1@133.927,85.529 cw(c134.708,84.748) 134.708,85.852 ; Y1.1@133.927,85.529 cw(c134.708,84.748) 134.708,85.852 ; Y1.1@133.927,85.529 cw(c134.708,84.748) 134.708,85.852 ; Y1.1@133.927,85.529 cw(c134.708,84.748) 134.708,85.852 ; Y1.1@133.927,85.529 cw(c134.708,84.748) 134.708,85.852 ; Y1.1@133.927,86.175 ccw(c134.708,86.956) 134.708,85.852 ; Y1.1@133.927,86.175 ccw(c134.708,86.956) 134.708,85.852 ; Y1.1@133.927,86.175 ccw(c134.708,86.956) 134.708,85.852 ; Y1.1@133.927,86.175 ccw(c134.708,86.956) 134.708,85.852 ; Y1.1@133.927,86.175 ccw(c134.708,86.956) 134.708,85.852 ; Y1.1@134.071,85.385 cw(c135.198,84.258) 135.198,85.852 ; Y1.1@134.071,85.385 cw(c135.198,84.258) 135.198,85.852 ; Y1.1@134.071,85.385 cw(c135.198,84.258) 135.198,85.852 ; Y1.1@134.071,85.385 cw(c135.198,84.258) 135.198,85.852 ; Y1.1@134.071,85.385 cw(c135.198,84.258) 135.198,85.852 ; Y1.1@134.071,86.319 ccw(c135.198,87.446) 135.198,85.852 ; Y1.1@134.071,86.319 ccw(c135.198,87.446) 135.198,85.852 ; Y1.1@134.071,86.319 ccw(c135.198,87.446) 135.198,85.852 ; Y1.1@134.071,86.319 ccw(c135.198,87.446) 135.198,85.852 ; Y1.1@134.071,86.319 ccw(c135.198,87.446) 135.198,85.852 ; 135.789,85.852 cw(c135.789,82.83) C3.2@137.926,84.967 ; 135.789,85.852 cw(c135.789,82.83) C3.2@137.926,84.967 ; 135.789,85.852 cw(c135.789,82.83) C3.2@137.926,84.967 ; 135.789,85.852 cw(c135.789,82.83) C3.2@137.926,84.967 ; 135.789,85.852 cw(c135.789,82.83) C3.2@137.926,84.967 ; 136.279,85.852 cw(c136.279,83.32) C3.2@138.07,85.111 ; 136.279,85.852 cw(c136.279,83.32) C3.2@138.07,85.111 ; 136.279,85.852 cw(c136.279,83.32) C3.2@138.07,85.111 ; 136.279,85.852 cw(c136.279,83.32) C3.2@138.07,85.111 ; 136.279,85.852 cw(c136.279,83.32) C3.2@138.07,85.111 ; 136.77,85.852 cw(c136.77,83.811) C3.2@138.213,85.254 ; 136.77,85.852 cw(c136.77,83.811) C3.2@138.213,85.254 ; 136.77,85.852 cw(c136.77,83.811) C3.2@138.213,85.254 ; 136.77,85.852 cw(c136.77,83.811) C3.2@138.213,85.254 ; 136.77,85.852 cw(c136.77,83.811) C3.2@138.213,85.254 ; 137.261,85.852 cw(c137.261,84.302) C3.2@138.357,85.398 ; 137.261,85.852 cw(c137.261,84.302) C3.2@138.357,85.398 ; 137.261,85.852 cw(c137.261,84.302) C3.2@138.357,85.398 ; 137.261,85.852 cw(c137.261,84.302) C3.2@138.357,85.398 ; 137.261,85.852 cw(c137.261,84.302) C3.2@138.357,85.398 ; C3.2@137.751,85.852 cw(c137.751,84.792) C3.2@138.501,85.542 ; C3.2@137.751,85.852 cw(c137.751,84.792) C3.2@138.501,85.542 ; C3.2@137.751,85.852 cw(c137.751,84.792) C3.2@138.501,85.542 ; C3.2@137.751,85.852 cw(c137.751,84.792) C3.2@138.501,85.542 ; C3.2@137.751,85.852 cw(c137.751,84.792) C3.2@138.501,85.542
NetC4_2: C4.2 U1.52 Y1.2 | length 74.9
  Bottom Layer w0.203: U1.52@126.099,88.606 128.992,88.606 129.591,89.205 132.461,89.205 133.604,90.348 Y1.2@133.604,90.729 ; Y1.2@133.604,91.237 Y1.2@133.604,90.729 ; C4.2@138.049,90.424 137.744,90.729 Y1.2@133.604,90.729 ; 132.652,89.395 ccw(c131.796,90.251) Y1.2@132.966,90.56 ; 132.652,89.395 ccw(c131.796,90.251) Y1.2@132.966,90.56 ; 132.652,89.395 ccw(c131.796,90.251) Y1.2@132.966,90.56 ; 132.652,89.395 ccw(c131.796,90.251) Y1.2@132.966,90.56 ; 132.652,89.395 ccw(c131.796,90.251) Y1.2@132.966,90.56 ; 132.901,89.645 ccw(c132.191,90.355) Y1.2@133.162,90.612 ; 132.901,89.645 ccw(c132.191,90.355) Y1.2@133.162,90.612 ; 132.901,89.645 ccw(c132.191,90.355) Y1.2@133.162,90.612 ; 132.901,89.645 ccw(c132.191,90.355) Y1.2@133.162,90.612 ; 132.901,89.645 ccw(c132.191,90.355) Y1.2@133.162,90.612 ; 133.127,89.871 cw(c133.604,89.394) Y1.2@133.604,90.068 ; 133.127,89.871 cw(c133.604,89.394) Y1.2@133.604,90.068 ; 133.127,89.871 cw(c133.604,89.394) Y1.2@133.604,90.068 ; 133.127,89.871 cw(c133.604,89.394) Y1.2@133.604,90.068 ; 133.127,89.871 cw(c133.604,89.394) Y1.2@133.604,90.068 ; 133.151,89.895 ccw(c132.586,90.46) Y1.2@133.358,90.664 ; 133.151,89.895 ccw(c132.586,90.46) Y1.2@133.358,90.664 ; 133.151,89.895 ccw(c132.586,90.46) Y1.2@133.358,90.664 ; 133.151,89.895 ccw(c132.586,90.46) Y1.2@133.358,90.664 ; 133.151,89.895 ccw(c132.586,90.46) Y1.2@133.358,90.664 ; Y1.2@133.927,90.406 cw(c134.708,89.625) 134.708,90.729 ; Y1.2@133.927,90.406 cw(c134.708,89.625) 134.708,90.729 ; Y1.2@133.927,90.406 cw(c134.708,89.625) 134.708,90.729 ; Y1.2@133.927,90.406 cw(c134.708,89.625) 134.708,90.729 ; Y1.2@133.927,90.406 cw(c134.708,89.625) 134.708,90.729 ; Y1.2@133.927,91.052 ccw(c134.708,91.833) 134.708,90.729 ; Y1.2@133.927,91.052 ccw(c134.708,91.833) 134.708,90.729 ; Y1.2@133.927,91.052 ccw(c134.708,91.833) 134.708,90.729 ; Y1.2@133.927,91.052 ccw(c134.708,91.833) 134.708,90.729 ; Y1.2@133.927,91.052 ccw(c134.708,91.833) 134.708,90.729 ; Y1.2@134.071,90.262 cw(c135.198,89.134) 135.198,90.729 ; Y1.2@134.071,90.262 cw(c135.198,89.134) 135.198,90.729 ; Y1.2@134.071,90.262 cw(c135.198,89.134) 135.198,90.729 ; Y1.2@134.071,90.262 cw(c135.198,89.134) 135.198,90.729 ; Y1.2@134.071,90.262 cw(c135.198,89.134) 135.198,90.729 ; Y1.2@134.071,91.196 ccw(c135.198,92.323) 135.198,90.729 ; Y1.2@134.071,91.196 ccw(c135.198,92.323) 135.198,90.729 ; Y1.2@134.071,91.196 ccw(c135.198,92.323) 135.198,90.729 ; Y1.2@134.071,91.196 ccw(c135.198,92.323) 135.198,90.729 ; Y1.2@134.071,91.196 ccw(c135.198,92.323) 135.198,90.729 ; 136.279,90.729 cw(c136.279,88.4) C4.2@137.926,90.047 ; 136.279,90.729 cw(c136.279,88.4) C4.2@137.926,90.047 ; 136.279,90.729 cw(c136.279,88.4) C4.2@137.926,90.047 ; 136.279,90.729 cw(c136.279,88.4) C4.2@137.926,90.047 ; 136.279,90.729 cw(c136.279,88.4) C4.2@137.926,90.047 ; 136.77,90.729 cw(c136.77,88.891) C4.2@138.07,90.191 ; 136.77,90.729 cw(c136.77,88.891) C4.2@138.07,90.191 ; 136.77,90.729 cw(c136.77,88.891) C4.2@138.07,90.191 ; 136.77,90.729 cw(c136.77,88.891) C4.2@138.07,90.191 ; 136.77,90.729 cw(c136.77,88.891) C4.2@138.07,90.191 ; 137.261,90.729 cw(c137.261,89.382) C4.2@138.213,90.334 ; 137.261,90.729 cw(c137.261,89.382) C4.2@138.213,90.334 ; 137.261,90.729 cw(c137.261,89.382) C4.2@138.213,90.334 ; 137.261,90.729 cw(c137.261,89.382) C4.2@138.213,90.334 ; 137.261,90.729 cw(c137.261,89.382) C4.2@138.213,90.334
NetD1_1: D1.1 R5.4 | length 30.9
  Top Layer w0.203: v1(137.846,110.693) 137.846,102.565 138.481,101.93 142.088,101.93 143.256,100.762 ; D1.1@143.256,99.568 143.256,100.762 ; v1@137.635,110.482 cw(c137.125,109.973) 137.846,109.973 ; v1@137.635,110.482 cw(c137.125,109.973) 137.846,109.973 ; v1@137.635,110.482 cw(c137.125,109.973) 137.846,109.973 ; v1@137.635,110.482 cw(c137.125,109.973) 137.846,109.973 ; v1@137.635,110.482 cw(c137.125,109.973) 137.846,109.973 ; 137.846,109.973 cw(c138.566,109.973) v1@138.057,110.482 ; 137.846,109.973 cw(c138.566,109.973) v1@138.057,110.482 ; 137.846,109.973 cw(c138.566,109.973) v1@138.057,110.482 ; 137.846,109.973 cw(c138.566,109.973) v1@138.057,110.482 ; 137.846,109.973 cw(c138.566,109.973) v1@138.057,110.482 ; D1.1@143.018,100.451 ccw(c142.934,100.762) 143.256,100.762 ; D1.1@143.018,100.451 ccw(c142.934,100.762) 143.256,100.762 ; D1.1@143.018,100.451 ccw(c142.934,100.762) 143.256,100.762 ; D1.1@143.018,100.451 ccw(c142.934,100.762) 143.256,100.762 ; D1.1@143.018,100.451 ccw(c142.934,100.762) 143.256,100.762 ; 143.256,100.762 ccw(c143.578,100.762) D1.1@143.494,100.451 ; 143.256,100.762 ccw(c143.578,100.762) D1.1@143.494,100.451 ; 143.256,100.762 ccw(c143.578,100.762) D1.1@143.494,100.451 ; 143.256,100.762 ccw(c143.578,100.762) D1.1@143.494,100.451 ; 143.256,100.762 ccw(c143.578,100.762) D1.1@143.494,100.451
  Bottom Layer w0.203: R5.4@134.366,108.496 136.169,108.496 ; R5.4@134.714,108.356 cw(c135.053,108.017) 135.053,108.496 cw(c135.053,108.975) R5.4@134.714,108.636 ; 136.258,108.496 136.169,108.496 ; v1(137.846,110.693) 137.846,110.172 136.169,108.496
NetD2_1: D2.1 R5.6 | length 67.7
  Top Layer w0.203: v1(136.957,111.887) 137.897,112.827 141.249,112.827 143.256,110.82 D2.1@143.256,107.696 ; v1@136.957,112.185 ccw(c136.957,112.906) 137.466,112.396 ; v1@136.957,112.185 ccw(c136.957,112.906) 137.466,112.396 ; v1@136.957,112.185 ccw(c136.957,112.906) 137.466,112.396 ; v1@136.957,112.185 ccw(c136.957,112.906) 137.466,112.396 ; v1@136.957,112.185 ccw(c136.957,112.906) 137.466,112.396 ; v1@137.255,111.887 cw(c137.976,111.887) 137.466,112.396 ; v1@137.255,111.887 cw(c137.976,111.887) 137.466,112.396 ; v1@137.255,111.887 cw(c137.976,111.887) 137.466,112.396 ; v1@137.255,111.887 cw(c137.976,111.887) 137.466,112.396 ; v1@137.255,111.887 cw(c137.976,111.887) 137.466,112.396 ; D2.1@142.609,108.343 ccw(c141.048,109.904) 143.256,109.904 ; D2.1@142.609,108.343 ccw(c141.048,109.904) 143.256,109.904 ; D2.1@142.609,108.343 ccw(c141.048,109.904) 143.256,109.904 ; D2.1@142.609,108.343 ccw(c141.048,109.904) 143.256,109.904 ; D2.1@142.609,108.343 ccw(c141.048,109.904) 143.256,109.904 ; D2.1@142.753,108.199 ccw(c141.539,109.413) 143.256,109.413 ; D2.1@142.753,108.199 ccw(c141.539,109.413) 143.256,109.413 ; D2.1@142.753,108.199 ccw(c141.539,109.413) 143.256,109.413 ; D2.1@142.753,108.199 ccw(c141.539,109.413) 143.256,109.413 ; D2.1@142.753,108.199 ccw(c141.539,109.413) 143.256,109.413 ; D2.1@142.897,108.055 ccw(c142.03,108.922) 143.256,108.922 ; D2.1@142.897,108.055 ccw(c142.03,108.922) 143.256,108.922 ; D2.1@142.897,108.055 ccw(c142.03,108.922) 143.256,108.922 ; D2.1@142.897,108.055 ccw(c142.03,108.922) 143.256,108.922 ; D2.1@142.897,108.055 ccw(c142.03,108.922) 143.256,108.922 ; 143.256,108.922 ccw(c144.482,108.922) D2.1@143.615,108.055 ; 143.256,108.922 ccw(c144.482,108.922) D2.1@143.615,108.055 ; 143.256,108.922 ccw(c144.482,108.922) D2.1@143.615,108.055 ; 143.256,108.922 ccw(c144.482,108.922) D2.1@143.615,108.055 ; 143.256,108.922 ccw(c144.482,108.922) D2.1@143.615,108.055 ; 143.256,109.413 ccw(c144.973,109.413) D2.1@143.759,108.199 ; 143.256,109.413 ccw(c144.973,109.413) D2.1@143.759,108.199 ; 143.256,109.413 ccw(c144.973,109.413) D2.1@143.759,108.199 ; 143.256,109.413 ccw(c144.973,109.413) D2.1@143.759,108.199 ; 143.256,109.413 ccw(c144.973,109.413) D2.1@143.759,108.199 ; 143.256,109.904 ccw(c145.464,109.904) D2.1@143.903,108.343 ; 143.256,109.904 ccw(c145.464,109.904) D2.1@143.903,108.343 ; 143.256,109.904 ccw(c145.464,109.904) D2.1@143.903,108.343 ; 143.256,109.904 ccw(c145.464,109.904) D2.1@143.903,108.343 ; 143.256,109.904 ccw(c145.464,109.904) D2.1@143.903,108.343
  Bottom Layer w0.203: R5.6@134.366,109.296 135.331,109.296 136.957,110.922 v1(136.957,111.887) ; R5.6@134.714,109.156 cw(c135.053,108.817) 135.053,109.296 cw(c135.053,109.775) R5.6@134.714,109.436 ; D2.1@143.256,107.696 D2.1@143.472,107.48 ; v1@136.746,111.676 cw(c136.236,111.167) 136.957,111.167 ; v1@136.746,111.676 cw(c136.236,111.167) 136.957,111.167 ; v1@136.746,111.676 cw(c136.236,111.167) 136.957,111.167 ; v1@136.746,111.676 cw(c136.236,111.167) 136.957,111.167 ; v1@136.746,111.676 cw(c136.236,111.167) 136.957,111.167 ; 136.957,111.167 cw(c137.677,111.167) v1@137.168,111.676 ; 136.957,111.167 cw(c137.677,111.167) v1@137.168,111.676 ; 136.957,111.167 cw(c137.677,111.167) v1@137.168,111.676 ; 136.957,111.167 cw(c137.677,111.167) v1@137.168,111.676 ; 136.957,111.167 cw(c137.677,111.167) v1@137.168,111.676
NetD3_1: D3.1 R5.8 | length 42.2
  Bottom Layer w0.203: R5.8@134.366,110.096 134.366,112.674 134.874,113.182 143.053,113.182 143.256,113.386 D3.1@143.256,115.824 ; R5.8@134.226,110.236 ccw(c133.887,110.575) 134.366,110.575 ; R5.8@134.226,110.236 ccw(c133.887,110.575) 134.366,110.575 ; R5.8@134.226,110.236 ccw(c133.887,110.575) 134.366,110.575 ; R5.8@134.226,110.236 ccw(c133.887,110.575) 134.366,110.575 ; R5.8@134.226,110.236 ccw(c133.887,110.575) 134.366,110.575 ; 134.366,110.575 ccw(c134.845,110.575) R5.8@134.506,110.236 ; 134.366,110.575 ccw(c134.845,110.575) R5.8@134.506,110.236 ; 134.366,110.575 ccw(c134.845,110.575) R5.8@134.506,110.236 ; 134.366,110.575 ccw(c134.845,110.575) R5.8@134.506,110.236 ; 134.366,110.575 ccw(c134.845,110.575) R5.8@134.506,110.236 ; D3.1@142.609,115.177 cw(c141.048,113.616) 143.256,113.616 ; D3.1@142.609,115.177 cw(c141.048,113.616) 143.256,113.616 ; D3.1@142.609,115.177 cw(c141.048,113.616) 143.256,113.616 ; D3.1@142.753,115.321 cw(c141.539,114.107) 143.256,114.107 ; D3.1@142.753,115.321 cw(c141.539,114.107) 143.256,114.107 ; D3.1@142.753,115.321 cw(c141.539,114.107) 143.256,114.107 ; D3.1@142.897,115.465 cw(c142.03,114.598) 143.256,114.598 ; D3.1@142.897,115.465 cw(c142.03,114.598) 143.256,114.598 ; D3.1@142.897,115.465 cw(c142.03,114.598) 143.256,114.598 ; 143.256,113.616 cw(c145.464,113.616) D3.1@143.903,115.177 ; 143.256,113.616 cw(c145.464,113.616) D3.1@143.903,115.177 ; 143.256,113.616 cw(c145.464,113.616) D3.1@143.903,115.177 ; 143.256,114.107 cw(c144.973,114.107) D3.1@143.759,115.321 ; 143.256,114.107 cw(c144.973,114.107) D3.1@143.759,115.321 ; 143.256,114.107 cw(c144.973,114.107) D3.1@143.759,115.321 ; 143.256,114.598 cw(c144.482,114.598) D3.1@143.615,115.465 ; 143.256,114.598 cw(c144.482,114.598) D3.1@143.615,115.465 ; 143.256,114.598 cw(c144.482,114.598) D3.1@143.615,115.465
NetD4_1: D4.1 R6.2 | length 19.8
  Bottom Layer w0.203: R6.2@86.868,89.916 88.9,89.916 D4.1@89.916,90.932 ; R6.2@87.101,89.683 cw(c87.665,89.119) 87.665,89.916 ; R6.2@87.101,89.683 cw(c87.665,89.119) 87.665,89.916 ; R6.2@87.101,89.683 cw(c87.665,89.119) 87.665,89.916 ; R6.2@87.101,89.683 cw(c87.665,89.119) 87.665,89.916 ; R6.2@87.101,89.683 cw(c87.665,89.119) 87.665,89.916 ; R6.2@87.101,90.149 ccw(c87.665,90.713) 87.665,89.916 ; R6.2@87.101,90.149 ccw(c87.665,90.713) 87.665,89.916 ; R6.2@87.101,90.149 ccw(c87.665,90.713) 87.665,89.916 ; R6.2@87.101,90.149 ccw(c87.665,90.713) 87.665,89.916 ; R6.2@87.101,90.149 ccw(c87.665,90.713) 87.665,89.916 ; R6.2@87.245,89.539 cw(c88.156,88.628) 88.156,89.916 ; R6.2@87.245,89.539 cw(c88.156,88.628) 88.156,89.916 ; R6.2@87.245,89.539 cw(c88.156,88.628) 88.156,89.916 ; R6.2@87.245,89.539 cw(c88.156,88.628) 88.156,89.916 ; R6.2@87.245,89.539 cw(c88.156,88.628) 88.156,89.916 ; R6.2@87.245,90.293 ccw(c88.156,91.204) 88.156,89.916 ; R6.2@87.245,90.293 ccw(c88.156,91.204) 88.156,89.916 ; R6.2@87.245,90.293 ccw(c88.156,91.204) 88.156,89.916 ; R6.2@87.245,90.293 ccw(c88.156,91.204) 88.156,89.916 ; R6.2@87.245,90.293 ccw(c88.156,91.204) 88.156,89.916